# Altium PCB Wakame.PcbDoc
Units mm, origin at the board's own origin, x right, y up, seen from the top; angles counter-clockwise.
Board outline 150 x 150 mm, 2 copper layers (Top Layer, Bottom Layer); 74 components, 89 nets, 674 pads, 0 vias.
Unrouted connection lines stored in the file: 39.
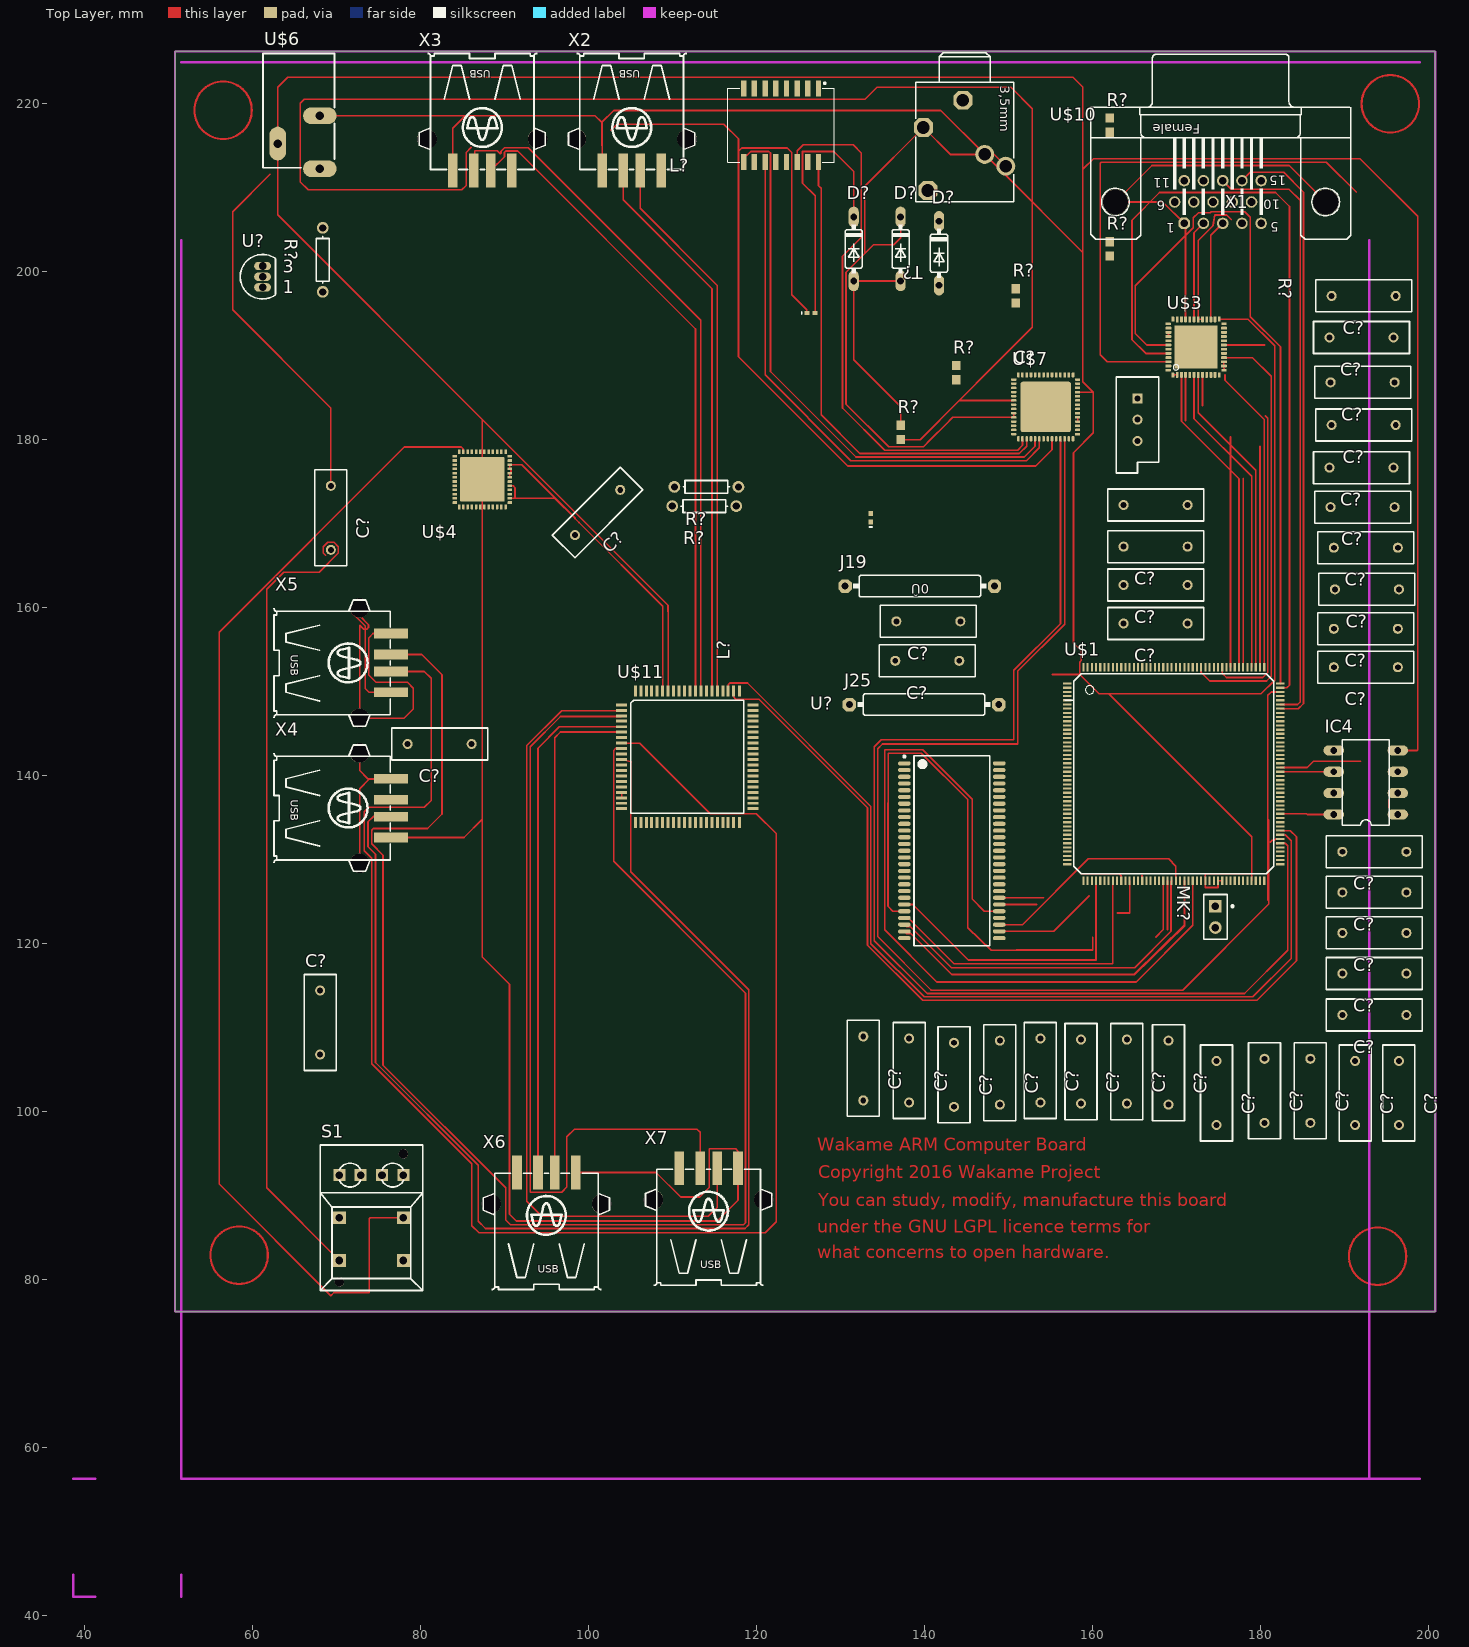
[diagram p0: Top Layer view]
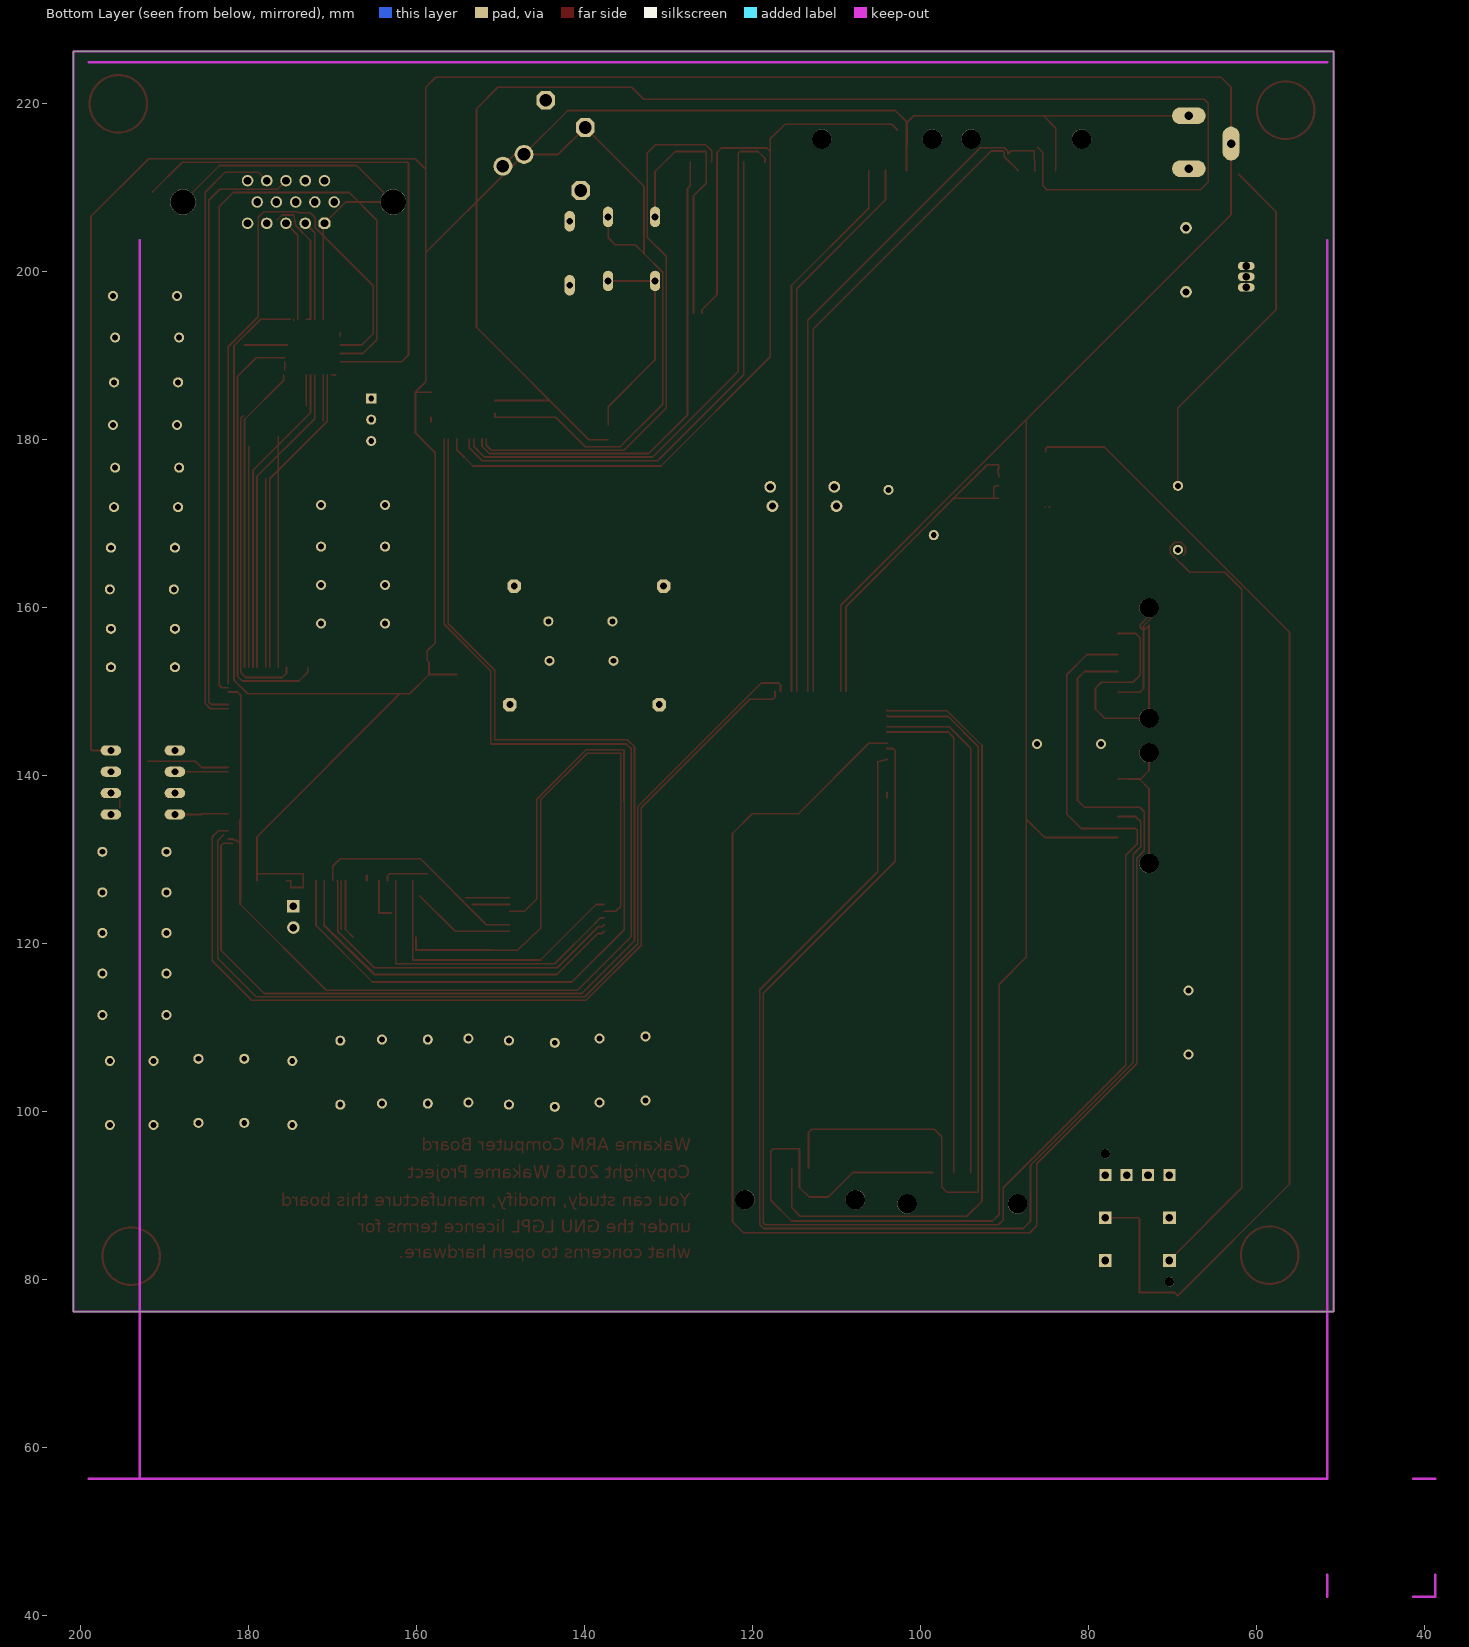
[diagram p1: Bottom Layer view, seen from below]

## Layer stack, top to bottom
Top Layer: signal copper 0.0356
Dielectric: core 0.32, FR-4, Dk 4.8
Bottom Layer: signal copper 0.0356

## Board outline
50.8,76.2 200.8,76.2 200.8,226.2 50.8,226.2

## Design rules (kind name [scope] priority, off if disabled: settings)
Clearance [All] p1: gap=0.2
PolygonConnect [All] p1: connectstyle=Relief reliefconductorwidth=0.254 reliefentries=4 polygonreliefangle="90 Angle"
RoutingLayers [All] p1: top layer_v5=TRUE bottom layer_v5=FALSE
RoutingVias [All] p1: holewidth=0.6 width=1 viastyle="Through Hole" minholewidth=0.711 minwidth=1.27 maxholewidth=0.711 maxwidth=1.27
SilkscreenOverComponentPads [IsPad] p1: minsilkscreentomaskgap=0.254
SolderMaskExpansion [All] p1: expansion=0.102
TestPointUsage [All] p1: valid=0 allowmultiple=FALSE
Testpoint [All] p1: side=3 testpointundercomponent=TRUE minsize=1.016 maxsize=2.54 preferedsize=1.524 minholesize=0 maxholesize=1.016 preferedholesize=0.813 testpointgrid=0.025 style=297 order=0123456789
Width [All] p1: maxlimit=0.2 minlimit=0.2 preferedwidth=0.2
22 further rules are at their usual default settings.

## Components (designator, comment, footprint, x,y, rotation, side; value= is the part's Value field where it differs from the comment)
C? "Cap" RAD-0.3 101.092,171.323 r45 top
C? "Cap" RAD-0.3 153.797,104.902 r90 top
C? "Cap" RAD-0.3 174.752,102.235 r90 top
C? "Cap" RAD-0.3 143.51,104.394 r90 top
C? "Cap" RAD-0.3 138.176,104.902 r90 top
C? "Cap" RAD-0.3 132.715,105.156 r90 top
C? "Cap" RAD-0.3 158.623,104.775 r90 top
C? "Cap" RAD-0.3 192.024,176.657 r0 top
C? "Cap" RAD-0.3 192.278,181.737 r0 top
C? "Cap" RAD-0.3 164.084,104.775 r90 top
C? "Cap" RAD-0.3 192.151,171.958 r0 top
C? "Cap" RAD-0.3 192.659,162.179 r0 top
C? "Cap" RAD-0.3 140.335,153.67 r0 top
C? "Cap" RAD-0.3 193.548,126.111 r0 top
C? "Cap" RAD-0.3 192.532,167.132 r0 top
C? "Cap" RAD-0.3 193.548,116.459 r0 top
C? "Cap" RAD-0.3 193.548,121.285 r0 top
C? "Cap" RAD-0.3 140.462,158.369 r0 top
C? "Cap" RAD-0.3 192.278,197.104 r0 top
C? "Cap" RAD-0.3 69.342,170.688 r90 top
C? "Cap" RAD-0.3 82.296,143.764 r0 top
C? "Cap" RAD-0.3 191.262,102.235 r90 top
C? "Cap" RAD-0.3 192.151,186.817 r0 top
C? "Cap" RAD-0.3 196.469,102.235 r90 top
C? "Cap" RAD-0.3 167.513,167.259 r0 top
C? "Cap" RAD-0.3 192.024,192.151 r0 top
C? "." RAD-0.3 167.513,158.115 r0 top
C? "." RAD-0.3 192.532,152.908 r0 top
C? "." RAD-0.3 167.513,162.687 r0 top
C? "Cap" RAD-0.3 192.532,157.48 r0 top
C? "Cap" RAD-0.3 148.971,104.648 r90 top
C? "Cap" RAD-0.3 193.548,111.506 r0 top
C? "Cap" RAD-0.3 185.928,102.489 r90 top
C? "Cap" RAD-0.3 193.548,130.937 r0 top
C? "Cap" RAD-0.3 180.467,102.489 r90 top
C? "Cap" RAD-0.3 169.037,104.648 r90 top
C? "Cap" RAD-0.3 68.072,110.617 r90 top
C? "Cap" RAD-0.3 167.513,172.212 r0 top
D? "." DIODE_DO35-7 131.572,202.692 r270 top
D? "." DIODE_DO35-7 141.732,202.184 r270 top
D? "." DIODE_DO35-7 137.16,202.692 r270 top
IC4 "AT25*P" DIL08 192.532,139.192 r90 top
J19 "0R" 0R/10 140.716,162.56 r180 top
J25 "0R" 0R/10 141.224,148.463 r180 top
L? "Inductor" 0402-A 126.492,195.072 r0 top
L? "Inductor" 0402-A 133.604,170.688 r90 top
MK? "Mic2" PIN2 174.625,124.46 r270 top
R? "Res1" AXIAL-0.3 68.377,201.396 r270 top
R? "Res1" AXIAL-0.3 113.792,172.085 r0 top
R? "Res1" AXIAL-0.3 114.046,174.371 r0 top
R? "RPot" VR5 165.354,182.372 r270 top
R? "Res3" J1-0603 137.16,180.848 r90 top
R? "Res3" J1-0603 162.052,202.692 r90 top
R? "Res3" J1-0603 143.764,187.96 r90 top
R? "Res3" J1-0603 162.052,217.424 r90 top
R? "Res3" J1-0603 150.876,197.104 r90 top
S1 "55?-2LED01" 5501-2LED 74.168,87.376 r270 top
T? "749010012A" 749010012A 122.936,217.424 r180 top
U$1 "ALLWINNER-A13" PG-LQFP-176-2 169.672,140.208 r0 top
U$3 "ADV7125" LFCSP48 172.339,191.008 r90 top
U$4 "AXP202" QFN48 89.916,177.8 r0 top
U$6 "PWR" SCD-014-A 65.532,226.06 r180 top
U$7 "LAN9500" QFN56 154.432,183.896 r90 top
U$10 "35MMSTEREOJACK" PG203J 154.94,217.932 r0 top
U$11 "USB2507" TQFP80 111.76,142.24 r0 top
U? "L78L05ABZ" TO92 61.214,199.39 r0 top
U? "K4S510432B-TC75" 54_TSOP2_400AF_N 143.256,131.064 r0 top
X1 "HF15H" HDF15H 175.26,208.28 r180 top
X2 "USB-A003" USB-A003 105.156,226.06 r180 top
X3 "USB-A003" USB-A003 87.376,226.06 r180 top
X4 "USB-A003" USB-A003 62.484,136.144 r270 top
X5 "USB-A003" USB-A003 62.484,153.416 r270 top
X6 "USB-A003" USB-A003 94.996,78.74 r0 top
X7 "USB-A003" USB-A003 114.3,79.248 r0 top

## Footprints (in the part's own frame and the unit in brackets; to place one, negate y for a bottom-side part, rotate by r counter-clockwise, add the part's x,y. Pads: shape width x height; smd on the part's side, far side on the other; paste and mask are expansions set on the pad)
0R/10 [mil]
  oct 63x63 hole 32: 1(-300,0) 2(400,0)
  silkscreen extent -262,-50 362,50
54_TSOP2_400AF_N [mm] "SOP, 54-Leads, Body 22.5x10.16mm, Pitch 0.8mm, IPC Medium Density"
  oval 1.5x0.5 smd: 1(-5.65,10.4) 2(-5.65,9.6) 3(-5.65,8.8) 4(-5.65,8) 5(-5.65,7.2) 6(-5.65,6.4) 7(-5.65,5.6) 8(-5.65,4.8) 9(-5.65,4) 10(-5.65,3.2) 11(-5.65,2.4) 12(-5.65,1.6) 13(-5.65,0.8) 14(-5.65,0) 15(-5.65,-0.8) 16(-5.65,-1.6) 17(-5.65,-2.4) 18(-5.65,-3.2) 19(-5.65,-4) 20(-5.65,-4.8) 21(-5.65,-5.6) 22(-5.65,-6.4) 23(-5.65,-7.2) 24(-5.65,-8) 25(-5.65,-8.8) 26(-5.65,-9.6) 27(-5.65,-10.4) 28(5.65,-10.4) 29(5.65,-9.6) 30(5.65,-8.8) 31(5.65,-8) 32(5.65,-7.2) 33(5.65,-6.4) 34(5.65,-5.6) 35(5.65,-4.8) 36(5.65,-4) 37(5.65,-3.2) 38(5.65,-2.4) 39(5.65,-1.6) 40(5.65,-0.8) 41(5.65,0) 42(5.65,0.8) 43(5.65,1.6) 44(5.65,2.4) 45(5.65,3.2) 46(5.65,4) 47(5.65,4.8) 48(5.65,5.6) 49(5.65,6.4) 50(5.65,7.2) 51(5.65,8) 52(5.65,8.8) 53(5.65,9.6) 54(5.65,10.4)
  silkscreen extent -5.77,-11.3 4.5,11.32, body extent -5.08,-11.23 5.08,11.23, height 1.2
0402-A [mm] "Chip Inductor; Body 1 x 0.5 mm (LxW typ)"
  rect 0.6x0.5 smd: 1(-0.5,0) 2(0.5,0)
  silkscreen extent -1.1,-0.15 -1.1,0.15
5501-2LED [mil]
  round 44 hole 44: 1(-300,150) 1(300,-150)
  rect 60x60 hole 36: 1A(0,150) 1B(0,-150) NC(200,-150) NO(200,150)
  rect 56x56 hole 36: +G(-200,150) +R(-200,-150) -G(-200,50) -R(-200,-50)
  silkscreen extent -341,-240 341,241
749010012A [mm] "10/100 Base-T SMD Transformer 1 Port"
  rect 0.64x1.91 smd: 1(-4.445,-4.385) 2(-3.175,-4.385) 3(-1.905,-4.385) 4(-0.635,-4.385) 5(0.635,-4.385) 6(1.905,-4.385) 7(3.175,-4.385) 8(4.445,-4.385) 9(4.445,4.385) 10(3.175,4.385) 11(1.905,4.385) 12(0.635,4.385) 13(-0.635,4.385) 14(-1.905,4.385) 15(-3.175,4.385) 16(-4.445,4.385)
  silkscreen extent -6.35,-5.1 6.35,4.4, body extent -6.35,-4.7 6.35,4.7, height 6.35
AXIAL-0.3 [mm] "Resistor; 2 Leads"
  round 1.4 hole 0.85: 1(-3.81,0) 2(3.81,0)
  silkscreen extent -2.77,-0.76 2.77,0.76
DIL08 [mil]
  oval 48x96 hole 32: 1(-150,-150) 2(-50,-150) 3(50,-150) 4(150,-150) 5(150,150) 6(50,150) 7(-50,150) 8(-150,150)
  silkscreen extent -200,-110 200,110
DIODE_DO35-7 [mil]
  oval 96x48 hole 32: A(150,0) C(-150,0)
  silkscreen extent -115,-40 115,40
HDF15H [mil]
  round 119 hole 119: 1(-492.13,0) 1(493,0)
  oct 54x54 hole 36: 1(171,100)
  round 54 hole 36: 2(81,100) 3(-9.57,100) 4(-99.57,100) 5(-189.57,100) 6(216,0) 7(126,0) 8(36,0) 9(-54.57,0) 10(-144.57,0) 11(171,-100) 12(81,-100) 13(-9.57,-100) 14(-99.57,-100) 15(-189.57,-100)
  silkscreen extent -610,-693 610,175
J1-0603 [mm] "Chip Resistor; Body 1.6 x 0.8 mm (LxW typ)"
  rect 1.1x1 smd: 1(-0.85,0) 2(0.85,0)
LFCSP48 [mil]
  rrect50% 24x13 smd: 1(-130.91,109) 12(-130.91,-108.27) 25(131,-108.27) 36(131,109)
  rrect50% 28x13 smd: 2(-129.92,89) 3(-129.92,69) 4(-129.92,50) 5(-129.92,30) 6(-129.92,10) 7(-129.92,-9.84) 8(-129.92,-29.53) 9(-129.92,-49.21) 10(-129.92,-68.9) 11(-129.92,-88.58) 26(130,-88.58) 27(130,-68.9) 28(130,-49.21) 29(130,-29.53) 30(130,-9.84) 31(130,10) 32(130,30) 33(130,50) 34(130,69) 35(130,89)
  rrect50% 13x24 smd: 13(-108.27,-130.91) 24(109,-130.91) 37(109,131) 48(-108.27,131)
  rrect50% 13x28 smd: 14(-88.58,-129.92) 15(-68.9,-129.92) 16(-49.21,-129.92) 17(-29.53,-129.92) 18(-9.84,-129.92) 19(10,-129.92) 20(30,-129.92) 21(50,-129.92) 22(69,-129.92) 23(89,-129.92) 38(89,130) 39(69,130) 40(50,130) 41(30,130) 42(10,130) 43(-9.84,130) 44(-29.53,130) 45(-49.21,130) 46(-68.9,130) 47(-88.58,130)
  rect 201x201 smd: EXP(0,0)
  silkscreen extent -107,82 -81,108
PG203J [mil]
  oct 88.5x88.5 hole 59: GND(-408,97) LEFT1(-572,-326) LEFT2(-593,-31)
  round 88.5 hole 59: RIGHT1(-207,-212) RIGHT2(-306,-157)
  silkscreen extent -630,-380 -170,320
PG-LQFP-176-2 [mil]
  rect 10x40 smd: AGND(247,-500) AVCC(286,-500) DDR3_A0(-49.21,-500) DDR3_A1(-285.43,-500) DDR3_A2(-9.84,-500) DDR3_A3(-29.53,-500) DDR3_A4(-305.12,-500) DDR3_A5(10,-500) DDR3_A6(-246.06,-500) DDR3_A7(89,-500) DDR3_A8(-226.38,-500) DDR3_A9(50,-500) DDR3_A10(-364.17,-500) DDR3_A11(-206.69,-500) DDR3_A12(-324.8,-500) DDR3_A13(30,-500) DDR3_A14(-187.01,-500) DDR3_BA0(-68.9,-500) DDR3_BA1(-344.49,-500) DDR3_BA2(-108.27,-500) DDR3_CAS(-147.64,-500) DDR3_CK(-423.23,-500) DDR3_CK_N(-403.54,-500) DDR3_CKE(-383.86,-500) DDR3_ODT(109,-500) DDR3_RAS(-167.32,-500) DDR3_RST(69,-500) DDR3_WE(-127.95,-500) HPBP(168,-500) HPCOM(207,-500) HPOUTL(148,-500) HPOUTR(227,-500) LCD_D2/PD2(128,500) LCD_D3/PD3(148,500) LCD_D4/PD4(168,500) LCD_D5/PD5(188,500) LCD_D6/PD6(207,500) LCD_D7/PD7(227,500) LCD_D10/PD10(266,500) LCD_D11/PD11(286,500) LCD_D12/PD12(306,500) LCD_D13/PD13(325,500) LCD_D14/PD14(345,500) LCD_D15/PD15(365,500) LCD_D18/PD18(384,500) LCD_D19/PD19(404,500) LCD_D20/PD20(424,500) LRADC(384,-500) MICIN1(345,-500) NDQ0/SDC2_D0/PC8(-383.86,500) NDQ1/SDC2_D1/PC9(-344.49,500) NDQ2/SDC2_D2/PC10(-324.8,500) NDQ3/SDC2_D3/PC11(-305.12,500) NDQ4/SDC2_D4/PC12(-265.75,500) NDQ5/SDC2_D5/PC13(-246.06,500) NDQ6/SDC2_D6/PC14(-226.38,500) NDQ7/SDC2_D7/PC15(-206.69,500) NDQS/PC19(-147.64,500) NMI_N(-68.9,500) NRB0/SDC2_CMD/PC6(-423.23,500) NRB1/SDC2_CLK/PC7(-403.54,500) PB3/EINT17(89,500) PB17(-127.95,500) PB18(-108.27,500) PG0/EINT0(-9.84,500) PG1/EINT1(10,500) PG2/EINT2(30,500) PG3/UART1_TX/EINT3(50,500) PG4/UART1_RX/EINT14(69,500) RESET_N(-88.58,500) TPX2(404,-500) TPY2(424,-500) UBOOT(-49.21,500) V33_HP(188,-500) VCC3(247,500) VCC4(-167.32,500) VCC4_DRAM(-265.75,-500) VCC5_DRAM(-88.58,-500) VDD2_INT(128,-500) VDD5_CPU(-29.53,500) VDD5_INT(109,500) VDD6_CPU(-187.01,500) VDD7_CPU(-285.43,500) VDD8_CPU(-364.17,500) VMIC(365,-500) VRA1(325,-500) VRA2(306,-500) VRP(266,-500)
  rect 40x10 smd: CSI_D0/SDC_D0/PE4(500,148) CSI_D2/SDC2_D2/PE6(500,188) CSI_D3/SDC2_D3/PE7(500,207) CSI_D4/SDC2_CMD/PE8(500,227) CSI_D5/SDC2_CLK/PE9(500,247) CSI_D6/UART1_TX/PE10(500,266) CSI_D7/UART1_RX/PE11(500,286) CSI_DI/SDC2_DI/PE5(500,168) CSI_HSYNC/SP2_MOSI/P(500,109) CSI_MCLK/SPI2_CLK/EI(500,89) CSI_PCLK/SPI2_CS0/EI(500,69) CSI_VSYNC/SPI2_MISO/(500,128) DDR3_D0(-500,10) DDR3_D1(-500,-344.49) DDR3_D2(-500,30) DDR3_D3(-500,-364.17) DDR3_D4(-500,69) DDR3_D5(-500,-423.23) DDR3_D6(-500,50) DDR3_D7(-500,-383.86) DDR3_D9(-500,-49.21) DDR3_D10(-500,-324.8) DDR3_D11(-500,-29.53) DDR3_D12(-500,-265.75) DDR3_D13(-500,-68.9) DDR3_D14(-500,-305.12) DDR3_D15(-500,-88.58) DDR3_DM0(-500,-127.95) DDR3_DM1(-500,-108.27) DDR3_DQS0(-500,-167.32) DDR3_DQS0_N(-500,-187.01) DDR3_DQS1(-500,-206.69) DDR3_DQS1_N(-500,-226.38) DDR3_R8(-500,-285.43) DZQ(-500,109) LCD_CLK/PD24(500,365) LCD_D21/PD21(500,424) LCD_D22/PD22(500,404) LCD_D23/PD23(500,384) LCD_DE/PD25(500,345) LCD_HSYNC/PD26(500,325) LCD_VSYNC/PD27(500,306) NALE/SPIO_MISO/PCI(-500,306) NC(500,-226.38) NCE0(-500,404) NCE1/SPIO0/PC3(-500,384) NCLE/SPIO_CLK/PC2(-500,325) NRE(-500,424) NWE/SPIO_MOSI/PC0(-500,286) PB2/EINT16(500,-147.64) PB4_EINT18(500,-127.95) PB10/EINT24(-500,247) PB15(500,-108.27) PB16(500,-88.58) PG9/SPI1_CS0/UART3_T(-500,207) PG10/SPI1_CLK/UART3_(-500,188) PG11/SPI1_MOSI/EINT1(-500,168) PG12/SPI1_MISO/UART3(-500,148) SDC0/PF1(500,-49.21) SDC0_CLK/PF2(500,-9.84) SDC0_CMD/PF3(500,10) SDC0_D3/PF4(500,30) SDC0_DI/PF0(500,-68.9) SDCO_D2/PF5(500,50) SVREF(-500,89) TPX1(500,-423.23) TPY1(500,-403.54) TWI0-SCK/PB0(500,-187.01) TWIO-SDA/PB1(500,-167.32) UDM0(500,-344.49) UDM1(500,-305.12) UDP0(500,-324.8) UDP1(500,-285.43) V33_USB(500,-265.75) VCC1(-500,345) VCC1_DRAM(-500,-9.84) VCC2(500,-206.69) VCC2_DRAM(-500,-147.64) VCC3_DRAM(-500,-403.54) VDD1_CPU(-500,365) VDD1_INT(-500,-246.06) VDD2_CPU/PB10/EINT24(-500,266) VDD3-INT(500,-246.06) VDD3_CPU(-500,227) VDD4_CPU(-500,128) VDD4_INT(500,-29.53) X24MIN(500,-364.17) X24OUT(500,-383.86)
  silkscreen extent -512,-468 469,469
PIN2 [mm] "Photosensitive Diode; 2 Leads"
  rect 1.5x1.5 hole 0.9: 1(0,0)
  round 1.5 hole 0.9: 2(2.54,0)
  silkscreen extent -1.4,-1.4 3.94,2.18
QFN48 [mil]
  rrect30% 22x12 smd: ACIN(29,-50.79) ACIN1(29,-70.47) BACKUP(29,-109.84) CHGLED(29,9) DC3SET(29,-129.53) DCDC2(-228.94,-168.9) GPIO2(-228.94,-70.47) GPIO3(-228.94,-31.1) IPSOUT(29,-11.42) IPSOUT1(29,-31.1) LDO1(29,-149.21) LDO2(-228.94,-208.27) LDO4(-228.94,-188.58) LX2(-228.94,-129.53) N_OE(-228.94,-50.79) N_VBUSEN(-228.94,-90.16) PGND2(-228.94,-149.21) PWREN(29,-168.9) PWROK(29,-208.27) SCK(-228.94,-11.42) SDA(-228.94,9) VBUS(29,-90.16) VIN2(-228.94,-109.84) VINT(29,-188.58)
  rrect30% 12x22 smd: AGND(-31.1,-228.94) APS(-50.79,-228.94) BAT(-11.42,29) BAT1(-31.1,29) BATSENSE(-90.16,29) BIAS(-11.42,-228.94) CHSENSE(-109.84,29) DCDC3(-129.53,-228.94) EXTEN(-70.47,-228.94) GPIO0(-90.16,-228.94) GPIO1(-109.84,-228.94) IRQ(-208.27,29) LDO3(-70.47,29) LDO3IN(-50.79,29) LDO24IN(-208.27,-228.94) LX(-168.9,-228.94) LX1(-149.21,29) PGND1(-168.9,29) PGND3(-149.21,-228.94) PWRON(-188.58,29) TS(9,29) VIN1(-129.53,29) VIN3(-188.58,-228.94) VREF(9,-228.94)
  rrect5% 209x209 smd: EXP(-100,-100)
QFN56 [mil]
  rrect50% 24x12 smd: 1(-149.61,128) 2(-149.61,109) 3(-149.61,89) 4(-149.61,69) 5(-149.61,50) 6(-149.61,30) 7(-149.61,10) 8(-149.61,-9.84) 9(-149.61,-29.53) 10(-149.61,-49.21) 11(-149.61,-68.9) 12(-149.61,-88.58) 13(-149.61,-108.27) 14(-149.61,-127.95) 29(150,-127.95) 30(150,-108.27) 31(150,-88.58) 32(150,-68.9) 33(150,-49.21) 34(150,-29.53) 35(150,-9.84) 36(150,10) 37(150,30) 38(150,50) 39(150,69) 40(150,89) 41(150,109) 42(150,128)
  rrect50% 12x24 smd: 15(-127.95,-149.61) 16(-108.27,-149.61) 17(-88.58,-149.61) 18(-68.9,-149.61) 19(-49.21,-149.61) 20(-29.53,-149.61) 21(-9.84,-149.61) 22(10,-149.61) 23(30,-149.61) 24(50,-149.61) 25(69,-149.61) 26(89,-149.61) 27(109,-149.61) 28(128,-149.61) 43(128,150) 44(109,150) 45(89,150) 46(69,150) 47(50,150) 48(30,150) 49(10,150) 50(-9.84,150) 51(-29.53,150) 52(-49.21,150) 53(-68.9,150) 54(-88.58,150) 55(-108.27,150) 56(-127.95,150)
  rrect10% 237x237 smd: EPAD(0,0)
RAD-0.3 [mm] "Capacitor; 2 Leads"
  round 1.2 hole 0.7: 1(-3.81,0) 2(3.81,0)
  silkscreen extent -5.71,-1.9 5.71,1.9
SCD-014-A [mil]
  oval 158x79 hole 40: +(-98.43,544) GND1(-98.43,296)
  oval 79x158 hole 40: GND(99,426)
  silkscreen extent -167,4 168,540
TO92 [mm] "TO, Flat Index; 3 In-Line, Axial Leads; Body Dia. 4.8mm; Leads 0.51 x 0.51 mm (max)"
  oval 2x1 hole 0.9: 1(0,-1.27) 2(0,0) 3(0,1.27)
  silkscreen extent -2.65,-2.65 1.55,2.65
TQFP80 [mil]
  rect 14x52 smd: AM1/GANG_EN(-191.93,-307.09) AM2/MTT_EN(-140.75,-307.09) AM3(-89.57,-307.09) AM4/LED_EN(-38.39,-307.09) AM5(90,-307.09) AM6(141,-307.09) AM7(192,-307.09) ATEST/REG_EN(-191.93,308) GR1/NON_REM0(-166.34,-307.09) GR2_NON_REM1(-115.16,-307.09) GR3/PRT_DIS0(-63.98,-307.09) GR4/PRT_DIS1(-12.8,-307.09) GR5(116,-307.09) GR6(167,-307.09) GR7(218,-307.09) PRTPWR1(244,-307.09) RBIAS(-217.52,308) SCL/SMBCLK/CFG_SEL0(-243.11,-307.09) SDA/SMBDATA(-217.52,-307.09) USBDN0(192,308) USBDN1(141,308) USBDN2(39,308) USBDP0(218,308) USBDP1(116,308) USBDP2(64,308) VDD18(64,-307.09) VDD18.2(-38.39,308) VDD33(13,-307.09) VDD33.3(244,308) VDDA18/PLL(-140.75,308) VDDA33.4(90,308) VDDA33/PLL(-166.34,308) VSS0(-243.11,308) VSS4(39,-307.09) VSS6(167,308) VSS7(13,308) VSS8(-12.8,308) VSS9(-63.98,308) XTAL1/CLKIN(-115.16,308) XTAL2(-89.57,308)
  rect 52x14 smd: CFG_SEL1(-307.09,-243.11) CLKIN_EN(308,167) OCS1_N(308,-243.11) OCS2_N(308,-191.93) OCS3_N(308,-140.75) OCS4_N(308,-89.57) OCS5_N(308,39) OCS6_N(308,90) OCS7_N(308,141) PRTPWR2(308,-217.52) PRTPWR3(308,-166.34) PRTPWR4(308,-115.16) PRTPWR5(308,-63.98) PRTPWR6(308,64) PRTPWR7(308,116) PRTPWR_POL(308,192) RESET_N(308,218) SELF_PWR(-307.09,-217.52) TEST0(-307.09,-166.34) TEST1(-307.09,-191.93) USBDN3(-307.09,192) USBDN4(-307.09,141) USBDN5(-307.09,39) USBDN6(-307.09,-12.8) USBDN7(-307.09,-115.16) USBDP3(-307.09,218) USBDP4(-307.09,116) USBDP5(-307.09,64) USBDP6(-307.09,-38.39) USBDP7(-307.09,-89.57) VBUS_DET(308,244) VDD18.3(308,-12.8) VDD33CR(308,13) VDDA3.1(-307.09,90) VDDA33(-307.09,244) VDDA33.2(-307.09,-63.98) VSS(-307.09,167) VSS1(-307.09,13) VSS3(-307.09,-140.75) VSS5(308,-38.39)
  silkscreen extent -264,-264 265,265
USB-A003 [mil]
  round 91 hole 91: 1(-258.66,405) 1(259,405)
  rect 45x158 smd: 1(-137.8,552) 2(-39.37,552) 3(40,552) 4(138,552)
  silkscreen extent -295,0 296,548
VR5 [mm] "Potentiometer; 3 Leads"
  rect 1.2x1.2 hole 0.7: 1(-2.54,0)
  round 1.2 hole 0.7: 2(0,0) 3(2.54,0)
  silkscreen extent -5.08,-2.54 6.35,2.54

## Part data
C? C? C? C? C? C? C? C? C? C? C? C? C? C? C? C? C? C? C? C? C? C? C? C? C? C? C? C? C? C? C? C? C? C? C?: "Capacitor"
C? C? C?: library part Cap, "Capacitor"
D? D? D?: library part SCHOTTKY-DIODEDO35-7
IC4: "SPI bus serial <B>EEPROM</B>"
J19 J25: "Bridge 0R 10mm"
MK?: "Microphone"
R? R? R? R? R? R? R? R?: "Resistor"
R?: "Potentiometer"
S1: "<b>PUSHBUTTON SERIES 5500 SWITCHES</b> 2 LED<p> / Source: www.e-switch.com .. 5500.pdf"
T?: "10/100 Base-T SMD Transformer 1 Port"
U$4: "Allwinner a13 pwr ic"
U$6: "Main Power Jack"
U$11: "usb 2507 hub on chiip"
U?: "Positive Voltage Regulator"
U?: "512Mb Synchronous High Data Rate DRAM, 32Mb x 4Bit x 4 Banks, 54-Pin TSOP"
X1: "<b>SUB-D</b>"
X2 X3 X4 X5 X6 X7: "<b>USB connector</b>"

## Nets (pads, with @x,y where several pads share a name; then routed paths per layer and width w, separated by ;. In a path a pad name is that pad's centre, name@x,y a point inside that pad or via, vN(x,y) a via of type N, cw(c..) or ccw(c..) an arc to the next point about the centre after c; other vN are vias at no path point)
GND: U$11.SELF_PWR
N$232: 
NetC2_1: S1.NC | length 98.5
  Top Layer w0.2: 61.722,106.172 61.722,105.537 ; 68.706,166.242 68.442,166.505 68.442,167.251 68.969,167.778 69.715,167.778 70.242,167.251 70.242,166.505 67.948,164.211 63.754,164.211 61.722,162.179 61.722,105.537 ; S1.NC 61.722,90.932 61.722,105.537
NetC2_2: S1.1A U$4.PWRON | length 140.7
  Top Layer w0.2: S1.1A 74.041,87.376 73.914,87.249 73.914,78.486 69.723,78.486 69.342,78.105 56.053,91.394 56.053,157.076 78.093,179.116 84.876,179.116 85.078,178.913 85.078,178.584 U$4.PWRON
NetC?_1: C?.1@98.398,168.629 U$4.LDO1 U$4.PWROK
NetC?_1: D?.C@137.16,206.502 L?.2@133.604,171.188 U$7.52 U?.2@137.606,140.664 | length 869.5
  Top Layer w0.2: 68.032,218.542 85.344,218.542 ; 71.882,159.36 73.431,157.81 73.431,150.368 73.889,149.911 76.505,149.911 ; 76.505,132.639 85.192,132.639 87.376,134.823 ; 83.871,212.039 83.871,217.068 85.344,218.542 ; 98.501,92.761 108.052,92.761 110.973,89.84 113.233,89.84 114.376,90.983 114.376,95.529 114.427,95.58 117.526,95.58 117.805,95.301 117.805,93.269 117.805,89.459 115.341,86.995 91.415,86.995 90.602,87.808 90.602,115.189 87.376,118.415 87.376,134.823 ; 109.485,150.063 109.485,159.512 ; 109.485,159.893 109.485,159.512 ; D?.C@137.16,206.502 137.16,204.013 136.347,203.2 133.937,203.2 132.893,202.156 ; 149.682,212.547 148.285,213.944 147.168,213.944 ; 150.622,183.146 U$7.52 143.383,182.646 142.508,181.772 140.759,180.022 139.885,179.148 135.738,179.148 130.66,184.226 130.66,199.923 ; 155.194,152.044 158.471,152.044 ; 158.232,185.649 160.096,185.649 ; 175.438,127.508 174.93,127.508 174.93,126.695 173.431,126.695 173.431,127.508 173.431,128.321 178.943,128.321 ; 178.943,127.508 178.943,128.321 ; 195.275,136.211 195.275,137.093 ; 196.342,143.002 198.628,143.002 198.704,143.078 198.704,206.578 191.846,213.436 160.122,213.436 158.852,212.166 ; 85.344,218.542 100.787,218.542 ; 87.376,134.823 87.376,170.891 87.376,178.537 87.376,179.244 87.376,179.299 87.376,182.397 ; 87.376,182.397 63.017,206.756 63.017,215.24 63.017,221.945 64.211,223.139 157.683,223.139 158.852,221.971 158.852,212.166 ; 87.376,182.397 90.475,179.299 109.474,160.299 109.474,159.523 109.485,159.512 ; 100.787,218.542 101.575,217.754 ; 100.787,218.542 101.575,217.754 ; 101.575,217.754 101.651,217.678 101.651,212.039 101.575,217.754 ; 101.575,217.754 102.997,219.177 141.935,219.177 147.168,213.944 ; 130.66,199.923 132.893,202.156 ; 130.66,199.923 132.893,202.156 ; 132.893,202.156 132.893,210.16 139.878,217.145 143.078,213.944 147.168,213.944 ; 147.168,213.944 149.123,211.988 158.852,202.26 ; 158.471,152.044 158.471,153.516 158.671,153.716 158.671,154.857 157.734,155.794 157.734,178.435 160.096,180.797 160.096,185.649 ; 158.471,152.044 160.782,149.733 161.95,149.733 ; 158.852,202.26 158.852,186.893 160.096,185.649 ; 158.852,202.26 158.852,212.166 ; 161.95,149.733 180.061,149.733 181.686,151.359 181.686,191.154 178.504,194.335 175.089,194.335 175.031,194.335 ; 161.95,149.733 178.943,132.74 178.943,128.321 ; 175.031,194.335 175.06,194.364 175.031,194.335
NetC?_2: C?.2@103.786,174.017 R?.1@137.16,179.998 U$4.VINT U$7.9 U$7.48 | length 345.7
  Top Layer w0.2: 86.055,214.782 85.446,214.173 85.446,210.236 84.938,209.728 66.65,209.728 65.71,210.668 65.71,220.015 66.192,220.497 132.918,220.497 134.341,221.92 150.292,221.92 152.832,219.38 152.832,193.358 139.471,179.998 ; U$4.VINT 91.261,173.01 ; 90.653,174.51 91.034,174.51 91.261,174.283 91.261,173.01 ; 90.653,175.51 90.653,176.01 90.78,176.01 90.78,176.51 90.653,176.51 90.653,177.01 92.052,177.01 98.425,170.637 98.4,170.612 ; 102.692,216.84 103.403,217.551 116.103,217.551 117.856,215.798 117.856,214.3 ; 108.835,150.063 108.835,160.176 98.882,170.129 ; 125.992,195.072 125.992,195.47 124.206,197.256 124.206,214.173 123.673,214.706 118.262,214.706 117.856,214.3 ; R?.1@137.16,179.998 139.471,179.998 ; U$7.48 144.143,184.658 139.483,179.998 139.471,179.998 ; U$7.9 155.182,178.804 153.238,176.86 130.861,176.86 117.856,189.865 117.856,214.3 ; 91.261,173.01 91.262,173.01 91.277,173.025 95.987,173.025 98.4,170.612 ; 98.4,170.612 98.882,170.129 ; 98.4,170.612 98.882,170.129
NetC?_2: L?.1@133.604,170.188
NetD?_A: D?.A@131.572,198.882 D?.A@137.16,198.882 R?.2@137.16,181.698 | length 25.1
  Top Layer w0.2: R?.2@137.16,181.698 137.16,183.896 131.572,189.484 131.572,198.882 D?.A@137.16,198.882
NetIC4_1: IC4.1 U$1.SDC0_D3/PF4 | length 11
  Top Layer w0.2: U$1.SDC0_D3/PF4 185.547,140.97 186.309,141.732 191.922,141.732 ; IC4.1 IC4.1@197.485,135.382
NetIC4_2: IC4.2 U$1.SDCO_D2/PF5
NetIC4_5: IC4.5
NetIC4_6: IC4.6 U$1.SDC0_CMD/PF3 | length 6.3
  Top Layer w0.2: U$1.SDC0_CMD/PF3 IC4.6
NetIC4_8: IC4.8 U$1.TWI0-SCK/PB0 | length 6.4
  Top Layer w0.2: U$1.TWI0-SCK/PB0 185.471,135.458 185.547,135.382 IC4.8
NetIC*_1: U$11.PRTPWR7
NetIC*_1: U$11.PRTPWR4
NetIC*_2: U$11.OCS2_N
NetIC*_3: U$11.VSS5
NetIC*_3: U$11.OCS3_N
NetIC*_4: U$11.PRTPWR5
NetIC*_4: U$11.PRTPWR3
NetIC*_5: X3.1 X4.1 | length 20.8
  Top Layer w0.2: X4.1@72.771,129.565 72.771,138.45 73.853,139.532 ; X4.1@72.771,142.714 72.771,140.614 ; 72.771,140.614 73.741,139.644 ; 72.771,140.614 73.741,139.644 ; 73.741,139.644 73.853,139.532 ; 73.741,139.644 76.505,139.644 73.853,139.532
NetIC*_5: 
NetIC*_7: U?.1@61.214,198.12
NetIC*_8: X5.1 | length 37.8
  Top Layer w0.2: X5.1@72.771,159.986 72.771,159.036 73.831,157.976 73.831,157.645 73.597,157.41 73.266,157.41 72.771,157.905 72.771,146.837 78.054,146.837 79.146,147.93 79.146,150.417 78.459,151.105 74.711,151.105 73.838,151.978 73.838,156.385 74.368,156.916 X5.1@76.505,156.916
NetIC*_8: X2.1
NetL9_1: U$4.LX2
NetL12_2: U$4.LX1
NetL13_1: U$4.LX
NetMK?_1: MK?.1 U$1.MICIN1
NetR?_1: R?.1@68.377,205.206 U$6.+ U?.3@137.606,139.864
NetR?_1: R?.1@165.354,184.912 U$3.37
NetR?_2: R?.2@68.377,197.586 U$4.TS
NetT?_9: T?.9 U$7.5 | length 67.2
  Top Layer w0.2: T?.9 118.491,213.468 119.323,214.3 121.469,214.3 121.666,214.103 121.666,188.112 131.851,177.927 151.892,177.927 153.162,179.197 U$7.5
NetT?_11: T?.11 U$7.6 | length 63.9
  Top Layer w0.2: T?.11 121.031,187.706 131.242,177.495 152.14,177.495 153.67,179.026 U$7.6
NetT?_14: T?.14 U$7.2 | length 65.5
  Top Layer w0.2: T?.14 124.841,214.376 125.559,215.094 131.514,215.094 132.486,214.122 132.486,204.064 130.251,201.828 130.251,183.769 135.272,178.748 151.087,178.748 151.663,179.324 U$7.2
NetT?_16: T?.16 U$7.3 | length 57.8
  Top Layer w0.2: T?.16 127.381,210.231 127.701,209.911 127.701,182.956 132.309,178.348 151.297,178.348 152.171,179.222 U$7.3
NetU$1_DDR3_A0: U$1.DDR3_A0 U?.23 | length 72
  Top Layer w0.2: U?.23 136.232,123.864 135.655,124.441 135.655,136.767 135.674,136.786 135.674,142.678 139.636,142.678 145.161,137.153 145.161,121.92 145.145,121.903 147.955,119.234 150.915,119.234 150.934,119.253 160.02,119.253 160.02,120.775 160.022,120.777 ; 167.513,120.777 168.422,121.686 U$1.DDR3_A0
NetU$1_DDR3_A1: U$1.DDR3_A1 U?.24 | length 37
  Top Layer w0.2: U?.24 138.084,123.064 138.656,122.492 138.656,122.456 143.51,117.602 162.422,117.602 U$1.DDR3_A1
NetU$1_DDR3_A2: U$1.DDR3_A2 U?.25 | length 41.7
  Top Layer w0.2: U?.25 137.856,122.014 138.334,122.014 143.216,117.132 165.011,117.132 169.349,121.47 169.349,127.435 U$1.DDR3_A2
NetU$1_DDR3_A3: U$1.DDR3_A3 U?.26 | length 13.6
  Top Layer w0.2: U?.26 137.856,121.214 138.374,121.214 143.256,116.332 ; 168.922,121.666 U$1.DDR3_A3
NetU$1_DDR3_A4: U$1.DDR3_A4 U?.29 | length 12.5
  Top Layer w0.2: U?.29 155.373,121.464 159.61,125.701
NetU$1_DDR3_A5: U$1.DDR3_A5 U?.30 | length 26.4
  Top Layer w0.2: U?.30 151.66,122.264 159.495,130.099 169.062,130.099 169.926,129.235 U$1.DDR3_A5
NetU$1_DDR3_A6: U$1.DDR3_A6 U?.31 | length 5.4
  Top Layer w0.2: 158.676,128.321 163.17,128.321 163.422,128.068 U$1.DDR3_A6
NetU$1_DDR3_A7: U$1.DDR3_A7 U?.32 | length 97.4
  Top Layer w0.2: 141.478,115.443 135.255,121.666 135.255,136.933 135.274,136.952 135.274,143.078 139.802,143.078 145.669,137.211 145.669,125.312 147.117,123.864 U?.32 ; 164.973,115.443 165.202,115.443 171.933,122.174 U$1.DDR3_A7
  Top Layer w0.254: 141.478,115.443 164.973,115.443
NetU$1_DDR3_A8: U$1.DDR3_A8 U?.33 | length 4.4
  Top Layer w0.2: U?.33 153.339,124.664
NetU$1_DDR3_A9: U$1.DDR3_A9 U?.34 | length 18.9
  Top Layer w0.2: U?.34 154.166,125.464 ; 170.942,122.174 U$1.DDR3_A9
  Top Layer w0.254: 164.973,116.332 170.942,122.174
NetU$1_DDR3_A10: U$1.DDR3_A10 U?.22 | length 35
  Top Layer w0.2: U?.22 138.607,124.664 145.212,118.059 160.422,118.059 U$1.DDR3_A10
NetU$1_DDR3_A11: U$1.DDR3_A11 U?.35 | length 5.3
  Top Layer w0.2: 162.984,123.655 164.422,123.655 U$1.DDR3_A11
NetU$1_DDR3_A12: U$1.DDR3_A12 U?.36
NetU$1_DDR3_BA0: U$1.DDR3_BA0
NetU$1_DDR3_CAS: U$1.DDR3_CAS U?.17 | length 1.3
  Top Layer w0.2: U$1.DDR3_CAS@165.849,127.508 165.849,128.14 165.922,128.067 U$1.DDR3_CAS
NetU$1_DDR3_DQS0: U$1.DDR3_DQS0 U?.5
NetU$1_DDR3_DQS1: U$1.DDR3_DQS1
NetU$1_DDR3_WE: U$1.DDR3_WE U?.16
NetU$1_LCD_D2/PD2: U$1.LCD_D2/PD2 U$3.16 | length 51.9
  Top Layer w0.2: U$1.LCD_D2/PD2 172.923,152.298 173.958,151.263 180.715,151.263 181.269,151.817 181.269,187.539 179.05,189.758 U$3.16
NetU$1_LCD_D7/PD7: U$1.LCD_D7/PD7 U$3.19 | length 42.4
  Top Layer w0.2: U$3.19@175.385,191.262 180.467,191.262 ; U$1.LCD_D7/PD7 175.438,152.197 175.952,151.682 180.275,151.682 180.869,152.276 180.869,182.536 180.55,182.855
NetU$1_LCD_D10/PD10: U$1.LCD_D10/PD10 U$3.8 | length 31.1
  Top Layer w0.2: 173.089,184.023 U$3.8 ; U$1.LCD_D10/PD10 176.428,180.34
NetU$1_LCD_D12/PD12: U$1.LCD_D12/PD12 U$3.3 | length 37.6
  Top Layer w0.2: U$3.3 170.586,182.18 177.444,175.322 U$1.LCD_D12/PD12
NetU$1_LCD_D13/PD13: U$1.LCD_D13/PD13 U$3.4 | length 27.9
  Top Layer w0.2: 171.069,182.263 U$3.4 ; U$1.LCD_D13/PD13 177.927,175.405
NetU$1_LCD_D15/PD15: U$1.LCD_D15/PD15 U$3.6 | length 37.6
  Top Layer w0.2: U$3.6 172.085,182.499 178.943,175.641 U$1.LCD_D15/PD15
NetU$1_LCD_D18/PD18: U$1.LCD_D18/PD18 U$3.7 | length 37.6
  Top Layer w0.2: U$3.7 172.589,183.185 179.426,176.348 U$1.LCD_D18/PD18
NetU$1_LCD_D19/PD19: U$1.LCD_D19/PD19 U$3.45 | length 26.3
  Top Layer w0.2: U$1.LCD_D19/PD19 179.934,179.197
NetU$1_LCD_D20/PD20: U$1.LCD_D20/PD20 U$3.41 | length 36.7
  Top Layer w0.2: 175.768,187.706 175.768,187.071 180.442,182.397 U$1.LCD_D20/PD20
NetU$1_LCD_D21/PD21: U$1.LCD_D21/PD21 U$3.42 | length 85.5
  Top Layer w0.2: U$3.42 166.472,191.262 165.1,192.634 165.1,198.331 172.001,205.232 172.001,206.393 172.618,207.01 174.001,207.01 174.117,207.126 178.116,207.126 178.791,206.451 178.791,194.615 182.372,191.033 U$1.LCD_D21/PD21
NetU$1_LCD_D22/PD22: U$1.LCD_D22/PD22 U$3.44 | length 98.2
  Top Layer w0.2: U$3.44 166.333,190.258 164.694,191.898 164.694,206.121 167.977,209.404 181.774,209.404 183.439,207.74 183.439,150.774 183.134,150.47 U$1.LCD_D22/PD22
NetU$1_LCD_D23/PD23: U$1.LCD_D23/PD23 U$3.46 | length 89.3
  Top Layer w0.2: U$3.46 161.747,189.258 160.909,190.096 160.909,212.903 161.036,213.03 187.833,213.03 191.389,209.474 ; 180.873,125.171 180.873,149.555 181.28,149.962 U$1.LCD_D23/PD23
NetU$1_LCD_HSYNC/PD26: U$1.LCD_HSYNC/PD26 X1.13 | length 72.4
  Top Layer w0.2: X1.13 176.519,209.804 183.389,209.804 184.709,208.484 184.709,148.768 184.404,148.463 U$1.LCD_HSYNC/PD26
NetU$1_LCD_VSYNC/PD27: U$1.LCD_VSYNC/PD27 X1.14 | length 72.6
  Top Layer w0.2: X1.14 178.78,211.811 182.76,211.811 185.115,209.455 185.115,148.59 184.506,147.98 U$1.LCD_VSYNC/PD27
NetU$1_UDM1: U$1.UDM1 U$7.12 | length 142.7
  Top Layer w0.2: 140.779,114.465 168.566,114.465 170.726,114.465 180.975,124.714 180.975,134.747 ; 140.779,114.49 134.423,120.847 134.423,143.186 135.001,143.764 151.117,143.764 151.117,152.457 156.682,158.021 U$7.12 ; 181.153,132.08 181.381,132.309 181.661,132.309 181.81,132.458 U$1.UDM1
NetU$1_UDP0: U$1.UDP0 U$7.11 | length 146.1
  Top Layer w0.2: U$7.11 156.182,158.087 150.642,152.547 150.642,144.272 134.867,144.272 134.023,143.428 134.023,120.358 140.316,114.065 178.1,114.065 183.242,119.207 183.242,131.647 182.931,131.958 U$1.UDP0 182.058,131.958 182.008,131.908 U$1.UDP0@181.864,131.908
NetU$1_UDP1: U$1.UDP1 U$11.USBDN0 | length 109.8
  Top Layer w0.2: U$11.USBDN0 116.637,150.825 116.84,151.028 118.93,151.028 133.623,136.335 133.623,119.996 139.954,113.665 179.07,113.665 183.642,118.237 183.642,132.247 182.931,132.958
NetU$1_V33_USB: U$1.V33_USB U$11.USBDP0 | length 111.1
  Top Layer w0.2: U$11.USBDP0 117.297,149.352 117.551,149.098 120.294,149.098 133.223,136.169 133.223,119.83 139.788,113.265 179.578,113.265 184.277,117.964 184.277,132.715 183.534,133.458 U$1.V33_USB
NetU$3_27: U$3.27 X1.3 | length 12
  Top Layer w0.2: U$3.27 174.089,204.326 X1.3
NetU$3_31: U$3.31 X1.2 | length 11.9
  Top Layer w0.2: U$3.31 172.085,204.622 X1.2
NetU$3_33: U$3.33 X1.1 | length 49.3
  Top Layer w0.2: U$3.33 171.069,205.588 170.917,205.74 168.377,208.28 162.738,208.28 167.081,212.623 183.417,212.623 X1.1@187.76,208.28
NetU$4_LDO3IN: U$4.LDO3IN U$4.VIN1
NetU$11_TEST0: U$11.TEST0 U$11.TEST1 | length 0.7
  Top Layer w0.2: U$11.TEST1 U$11.TEST0
NetU$11_USBDN1: U$11.USBDN1 X2.2 | length 65.8
  Top Layer w0.2: X2.2 106.156,207.534 115.341,198.349 U$11.USBDN1
NetU$11_USBDN2: U$11.USBDN2 X3.2 | length 77.5
  Top Layer w0.2: X3.2 90.005,213.668 90.005,214.17 90.18,214.346 91.572,214.346 112.751,193.167 U$11.USBDN2
NetU$11_USBDN3: U$11.USBDN3 X7.2 | length 96.6
  Top Layer w0.2: U$11.USBDN3 103.89,147.047 96.686,147.047 93.091,143.452 93.091,90.475 93.142,90.424 96.825,90.424 97.434,91.034 97.434,97.003 98.349,97.917 112.919,97.917 113.3,97.536 X7.2
NetU$11_USBDN4: U$11.USBDN4 X6.2 | length 61.5
  Top Layer w0.2: X6.2 93.996,143.272 96.545,145.821 U$11.USBDN4
NetU$11_USBDN5: U$11.USBDN5 X5.2 | length 178.5
  Top Layer w0.2: X5.2 80.159,154.416 82.575,152 82.575,135.433 80.848,133.706 74.397,133.706 74.193,133.502 74.193,131.877 75.551,130.519 75.551,105.526 90.145,90.932 90.145,87.114 90.721,86.538 118.466,86.538 118.694,86.766 118.694,114.097 102.997,129.794 102.997,143.002 103.226,143.231 U$11.USBDN5
NetU$11_USBDN6: U$11.USBDN6 X4.3 | length 150.9
  Top Layer w0.2: X4.3 74.371,135.128 73.762,134.518 73.762,131.547 74.651,130.658 74.651,105.86 86.881,93.63 86.881,86.97 87.744,86.106 118.643,86.106 119.101,86.563 119.101,114.503 105.054,128.549 105.054,141.61 105.105,141.661 U$11.USBDN6
NetU$11_USBDP1: U$11.USBDP1 X2.3 | length 66.4
  Top Layer w0.2: X2.3 104.14,208.534 114.706,197.968 U$11.USBDP1
NetU$11_USBDP2: U$11.USBDP2 X3.3 | length 82.5
  Top Layer w0.2: X3.3 86.453,214.371 89.159,214.371 89.523,214.007 89.605,214.089 89.605,214.336 90.015,214.746 92.848,214.746 113.386,194.208 U$11.USBDP2
NetU$11_USBDP3: U$11.USBDP3 X7.3 | length 95.8
  Top Layer w0.2: U$11.USBDP3 103.927,147.744 96.817,147.744 92.659,143.586 92.659,89.357 94.463,87.554 114.275,87.554 115.316,88.595 X7.3
NetU$11_USBDP4: U$11.USBDP4 X6.3 | length 60
  Top Layer w0.2: X6.3 96.012,144.526 96.672,145.186 U$11.USBDP4
NetU$11_USBDP5: U$11.USBDP5 X5.3 | length 188.9
  Top Layer w0.2: X5.3 80.467,152.4 81.28,151.587 81.28,137.033 80.467,136.22 73.863,136.22 73.33,135.687 73.33,131.065 74.227,130.168 74.227,105.718 86.125,93.82 86.125,86.443 86.97,85.598 121.05,85.598 122.352,86.9 122.352,133.121 119.99,135.484 114.503,135.484 106.121,143.866 U$11.USBDP5
pads on no net: C?.1@68.072,106.807 C?.1@69.342,166.878 C?.1@78.486,143.764 C?.1@132.715,101.346 C?.1@136.525,153.67 C?.1@136.652,158.369 C?.1@138.176,101.092 C?.1@143.51,100.584 C?.1@148.971,100.838 C?.1@153.797,101.092 C?.1@158.623,100.965 C?.1@163.703,158.115 C?.1@163.703,162.687 C?.1@163.703,167.259 C?.1@163.703,172.212 C?.1@164.084,100.965 C?.1@169.037,100.838 C?.1@174.752,98.425 C?.1@180.467,98.679 C?.1@185.928,98.679 C?.1@188.214,176.657 C?.1@188.214,192.151 C?.1@188.341,171.958 C?.1@188.341,186.817 C?.1@188.468,181.737 C?.1@188.468,197.104 C?.1@188.722,152.908 C?.1@188.722,157.48 C?.1@188.722,167.132 C?.1@188.849,162.179 C?.1@189.738,111.506 C?.1@189.738,116.459 C?.1@189.738,121.285 C?.1@189.738,126.111 C?.1@189.738,130.937 C?.1@191.262,98.425 C?.1@196.469,98.425 C?.2@68.072,114.427 C?.2@69.342,174.498 C?.2@86.106,143.764 C?.2@132.715,108.966 C?.2@138.176,108.712 C?.2@143.51,108.204 C?.2@144.145,153.67 C?.2@144.272,158.369 C?.2@148.971,108.458 C?.2@153.797,108.712 C?.2@158.623,108.585 C?.2@164.084,108.585 C?.2@169.037,108.458 C?.2@171.323,158.115 C?.2@171.323,162.687 C?.2@171.323,167.259 C?.2@171.323,172.212 C?.2@174.752,106.045 C?.2@180.467,106.299 C?.2@185.928,106.299 C?.2@191.262,106.045 C?.2@195.834,176.657 C?.2@195.834,192.151 C?.2@195.961,171.958 C?.2@195.961,186.817 C?.2@196.088,181.737 C?.2@196.088,197.104 C?.2@196.342,152.908 C?.2@196.342,157.48 C?.2@196.342,167.132 C?.2@196.469,106.045 C?.2@196.469,162.179 C?.2@197.358,111.506 C?.2@197.358,116.459 C?.2@197.358,121.285 C?.2@197.358,126.111 C?.2@197.358,130.937 D?.A@141.732,198.374 D?.C@131.572,206.502 D?.C@141.732,205.994 IC4.3 IC4.4 IC4.7 J19.1 J19.2 J25.1 J25.2 L?.1@125.992,195.072 L?.2@126.992,195.072 MK?.2 R?.1@109.982,172.085 R?.1@110.236,174.371 R?.1@143.764,187.11 R?.1@150.876,196.254 R?.1@162.052,201.842 R?.1@162.052,216.574 R?.2@117.602,172.085 R?.2@117.856,174.371 R?.2@143.764,188.81 R?.2@150.876,197.954 R?.2@162.052,203.542 R?.2@162.052,218.274 R?.2@165.354,182.372 R?.3 S1.1 S1.1B S1.+G S1.+R S1.-G S1.-R S1.NO T?.1 T?.2 T?.3 T?.4 T?.5 T?.6 T?.7 T?.8 T?.10 T?.12 T?.13 T?.15 U$1.AGND U$1.AVCC U$1.CSI_D0/SDC_D0/PE4 U$1.CSI_D2/SDC2_D2/PE6 U$1.CSI_D3/SDC2_D3/PE7 U$1.CSI_D4/SDC2_CMD/PE8 U$1.CSI_D5/SDC2_CLK/PE9 U$1.CSI_D6/UART1_TX/PE10 U$1.CSI_D7/UART1_RX/PE11 U$1.CSI_DI/SDC2_DI/PE5 U$1.CSI_HSYNC/SP2_MOSI/P U$1.CSI_MCLK/SPI2_CLK/EI U$1.CSI_PCLK/SPI2_CS0/EI U$1.CSI_VSYNC/SPI2_MISO/ U$1.DDR3_A13 U$1.DDR3_A14 U$1.DDR3_BA1 U$1.DDR3_BA2 U$1.DDR3_CK U$1.DDR3_CK_N U$1.DDR3_CKE U$1.DDR3_D0 U$1.DDR3_D1 U$1.DDR3_D2 U$1.DDR3_D3 U$1.DDR3_D4 U$1.DDR3_D5 U$1.DDR3_D6 U$1.DDR3_D7 U$1.DDR3_D9 U$1.DDR3_D10 U$1.DDR3_D11 U$1.DDR3_D12 U$1.DDR3_D13 U$1.DDR3_D14 U$1.DDR3_D15 U$1.DDR3_DM0 U$1.DDR3_DM1 U$1.DDR3_DQS0_N U$1.DDR3_DQS1_N U$1.DDR3_ODT U$1.DDR3_R8 U$1.DDR3_RAS U$1.DDR3_RST U$1.DZQ U$1.HPBP U$1.HPCOM U$1.HPOUTL U$1.HPOUTR U$1.LCD_CLK/PD24 U$1.LCD_D3/PD3 U$1.LCD_D4/PD4 U$1.LCD_D5/PD5 U$1.LCD_D6/PD6 U$1.LCD_D11/PD11 U$1.LCD_D14/PD14 U$1.LCD_DE/PD25 U$1.LRADC U$1.NALE/SPIO_MISO/PCI U$1.NC U$1.NCE0 U$1.NCE1/SPIO0/PC3 U$1.NCLE/SPIO_CLK/PC2 U$1.NDQ0/SDC2_D0/PC8 U$1.NDQ1/SDC2_D1/PC9 U$1.NDQ2/SDC2_D2/PC10 U$1.NDQ3/SDC2_D3/PC11 U$1.NDQ4/SDC2_D4/PC12 U$1.NDQ5/SDC2_D5/PC13 U$1.NDQ6/SDC2_D6/PC14 U$1.NDQ7/SDC2_D7/PC15 U$1.NDQS/PC19 U$1.NMI_N U$1.NRB0/SDC2_CMD/PC6 U$1.NRB1/SDC2_CLK/PC7 U$1.NRE U$1.NWE/SPIO_MOSI/PC0 U$1.PB2/EINT16 U$1.PB3/EINT17 U$1.PB4_EINT18 U$1.PB10/EINT24 U$1.PB15 U$1.PB16 U$1.PB17 U$1.PB18 U$1.PG0/EINT0 U$1.PG1/EINT1 U$1.PG2/EINT2 U$1.PG3/UART1_TX/EINT3 U$1.PG4/UART1_RX/EINT14 U$1.PG9/SPI1_CS0/UART3_T U$1.PG10/SPI1_CLK/UART3_ U$1.PG11/SPI1_MOSI/EINT1 U$1.PG12/SPI1_MISO/UART3 U$1.RESET_N U$1.SDC0/PF1 U$1.SDC0_CLK/PF2 U$1.SDC0_DI/PF0 U$1.SVREF U$1.TPX1 U$1.TPX2 U$1.TPY1 U$1.TPY2 U$1.TWIO-SDA/PB1 U$1.UBOOT U$1.UDM0 U$1.V33_HP U$1.VCC1 U$1.VCC1_DRAM U$1.VCC2 U$1.VCC2_DRAM U$1.VCC3 U$1.VCC3_DRAM U$1.VCC4 U$1.VCC4_DRAM U$1.VCC5_DRAM U$1.VDD1_CPU U$1.VDD1_INT U$1.VDD2_CPU/PB10/EINT24 U$1.VDD2_INT U$1.VDD3-INT U$1.VDD3_CPU U$1.VDD4_CPU U$1.VDD4_INT U$1.VDD5_CPU U$1.VDD5_INT U$1.VDD6_CPU U$1.VDD7_CPU U$1.VDD8_CPU U$1.VMIC U$1.VRA1 U$1.VRA2 U$1.VRP U$1.X24MIN U$1.X24OUT U$3.1 U$3.2 U$3.5 U$3.9 U$3.10 U$3.11 U$3.12 U$3.13 U$3.14 U$3.15 U$3.17 U$3.18 U$3.20 U$3.21 U$3.22 U$3.23 U$3.24 U$3.25 U$3.26 U$3.28 U$3.29 U$3.30 U$3.32 U$3.34 U$3.35 U$3.36 U$3.38 U$3.39 U$3.40 U$3.43 U$3.47 U$3.48 U$3.EXP U$4.ACIN U$4.ACIN1 U$4.AGND U$4.APS U$4.BACKUP U$4.BAT U$4.BAT1 U$4.BATSENSE U$4.BIAS U$4.CHGLED U$4.CHSENSE U$4.DC3SET U$4.DCDC2 U$4.DCDC3 U$4.EXP U$4.EXTEN U$4.GPIO0 U$4.GPIO1 U$4.GPIO2 U$4.GPIO3 U$4.IPSOUT U$4.IPSOUT1 U$4.IRQ U$4.LDO2 U$4.LDO3 U$4.LDO4 U$4.LDO24IN U$4.N_OE U$4.N_VBUSEN U$4.PGND1 U$4.PGND2 U$4.PGND3 U$4.PWREN U$4.SCK U$4.SDA U$4.VBUS U$4.VIN2 U$4.VIN3 U$4.VREF U$6.GND U$6.GND1 U$7.1 U$7.4 U$7.7 U$7.8 U$7.10 U$7.13 U$7.14 U$7.15 U$7.16 U$7.17 U$7.18 U$7.19 U$7.20 U$7.21 U$7.22 U$7.23 U$7.24 U$7.25 U$7.26 U$7.27 U$7.28 U$7.29 U$7.30 U$7.31 U$7.32 U$7.33 U$7.34 U$7.35 U$7.36 U$7.37 U$7.38 U$7.39 U$7.40 U$7.41 U$7.42 U$7.43 U$7.44 U$7.45 U$7.46 U$7.47 U$7.49 U$7.50 U$7.51 U$7.53 U$7.54 U$7.55 U$7.56 U$7.EPAD U$10.GND U$10.LEFT1 U$10.LEFT2 U$10.RIGHT1 U$10.RIGHT2 U$11.AM1/GANG_EN U$11.AM2/MTT_EN U$11.AM3 U$11.AM4/LED_EN U$11.AM5 U$11.AM6 U$11.AM7 U$11.ATEST/REG_EN U$11.CFG_SEL1 U$11.CLKIN_EN U$11.GR1/NON_REM0 U$11.GR2_NON_REM1 U$11.GR3/PRT_DIS0 U$11.GR4/PRT_DIS1 U$11.GR5 U$11.GR6 U$11.GR7 U$11.OCS1_N U$11.OCS4_N U$11.OCS5_N U$11.OCS6_N U$11.OCS7_N U$11.PRTPWR1 U$11.PRTPWR2 U$11.PRTPWR6 U$11.PRTPWR_POL U$11.RBIAS U$11.RESET_N U$11.SCL/SMBCLK/CFG_SEL0 U$11.SDA/SMBDATA U$11.USBDN7 U$11.USBDP6 U$11.USBDP7 U$11.VBUS_DET U$11.VDD18 U$11.VDD18.2 U$11.VDD18.3 U$11.VDD33 U$11.VDD33.3 U$11.VDD33CR U$11.VDDA3.1 U$11.VDDA18/PLL U$11.VDDA33 U$11.VDDA33.2 U$11.VDDA33.4 U$11.VDDA33/PLL U$11.VSS U$11.VSS0 U$11.VSS1 U$11.VSS3 U$11.VSS4 U$11.VSS6 U$11.VSS7 U$11.VSS8 U$11.VSS9 U$11.XTAL1/CLKIN U$11.XTAL2 U?.1@137.606,141.464 U?.2@61.214,199.39 U?.3@61.214,200.66 U?.4 U?.6 U?.7 U?.8 U?.9 U?.10 U?.11 U?.12 U?.13 U?.14 U?.15 U?.18 U?.19 U?.20 U?.21 U?.27 U?.28 U?.37 U?.38 U?.39 U?.40 U?.41 U?.42 U?.43 U?.44 U?.45 U?.46 U?.47 U?.48 U?.49 U?.50 U?.51 U?.52 U?.53 U?.54 X1.4 X1.5 X1.6 X1.7 X1.8 X1.9 X1.10 X1.11 X1.12 X1.15 X2.4 X3.4 X4.2 X4.4 X5.4 X6.1 X6.4 X7.1 X7.4
copper on no net: | length 275.8
  Top Layer w0.2: 62.103,211.582 57.658,207.137 57.658,195.453 69.342,183.769 69.342,174.498 ; 84.626,171.983 84.626,171.985 ; 85.126,171.983 85.126,171.985 ; 126.992,195.072 126.992,209.02 125.489,210.523 125.489,214.294 129.185,214.294 131.572,211.907 131.572,206.502 ; 158.232,182.146 158.232,182.646 ; 169.037,192.278 169.037,192.761 ; 169.57,187.683 169.799,187.683 169.824,187.708 170.078,187.708 ; 173.089,194.31 172.589,194.31 172.589,203.704 174.346,205.461 174.569,206.726 175.971,206.726 176.505,206.192 ; 174.589,194.132 174.589,194.31 ; 175.639,189.258 175.639,188.758 175.639,188.518 175.664,188.493 175.664,188.258 ; 152.832,193.358 152.832,219.38 152.832,193.358
  Top Layer w0.254: 143.256,116.332 164.973,116.332 ; 53.095,219.202 ccw(c56.515,219.202) 59.935,219.202 ; 53.095,219.202 cw(c56.515,219.202) 59.935,219.202 ; 53.095,219.202 ccw(c56.515,219.202) 59.935,219.202 ; 53.095,219.202 cw(c56.515,219.202) 59.935,219.202 ; 55,82.931 ccw(c58.42,82.931) 61.84,82.931 ccw(c58.42,82.931) 55,82.931 ; 190.509,82.804 ccw(c193.929,82.804) 197.349,82.804 ccw(c193.929,82.804) 190.509,82.804 ; 192.033,219.964 ccw(c195.453,219.964) 198.873,219.964 ccw(c195.453,219.964) 192.033,219.964

## Keep-outs
Keep-Out Layer:
  lines w0.254: 50.8,76.2 50.8,226.2 ; 50.8,76.2 200.8,76.2 ; 50.8,76.2 50.8,226.2 ; 50.8,76.2 200.8,76.2 ; 50.8,76.2 200.8,76.2 ; 50.8,76.2 50.8,226.2 ; 50.8,226.2 200.8,226.2 ; 50.8,226.2 200.8,226.2 ; 50.8,226.2 200.8,226.2 ; 200.8,76.2 200.8,226.2 ; 200.8,76.2 200.8,226.2 ; 200.8,76.2 200.8,226.2
  lines w0.3: 38.705,44.891 38.705,42.291 41.305,42.291 ; 38.705,56.338 41.305,56.338 ; 51.557,42.291 51.557,44.891 ; 51.557,203.738 51.557,56.338 198.956,56.338 ; 51.557,224.9 198.956,224.9 ; 192.924,56.338 192.924,203.738

## Other copper
Top Layer:
  text "Wakame ARM Computer Board" at 127.254,95.377 h1.52
  text "Copyright 2016 Wakame Project" at 127.381,92.075 h1.52
  text "You can study, modify, manufacture this board" at 127.381,88.773 h1.52
  text "under the GNU LGPL licence terms for" at 127.254,85.598 h1.52
  text "what concerns to open hardware." at 127.254,82.55 h1.52

## Silkscreen, mask and mechanical layers (free items; w line width, h text height)
Drill Drawing:
  text ".LEGEND" at 205.88,84.535 h1.52
  text "Drill Drawing." at 205.88,70.996 h1.52

## Dimensions
33.006,30.047 to 51.557,56.338 on Mechanical 1
30.834,35.397 to 51.557,56.338 on Mechanical 1

## Text inside footprints (layer, text, board x,y; h text height)
J19: Top Overlay "0Û" at 140.589,163.195 h1.97 r180
U$1: Mechanical 2 "ALLWINNER  A13" at 161.752,139.873 h1.97
U$4: Mechanical 2 ">AXP202" at 84.376,179.273 h1.97
U$6: Mechanical 2 "PWR_IN" at 70.612,226.06 h2.76 r270
U$10: Top Overlay "3,5mm" at 148.59,222.123 h1.97 r270; Mechanical 16 "5" at 140.081,215.519 h1.97 r270; Mechanical 16 "4" at 141.986,209.931 h1.97 r270; Mechanical 16 "3" at 146.05,212.598 h1.97 r270; Mechanical 16 "2" at 148.59,211.201 h1.97 r270; Mechanical 16 "1" at 143.51,221.742 h1.97 r270
U?: Top Overlay "3" at 63.635,199.857 h1.5; Top Overlay "1" at 63.635,197.411 h1.5
X1: Top Overlay "1" at 169.774,206.172 h1.97 r180; Top Overlay "5" at 182.175,206.273 h1.97 r180; Top Overlay "6" at 168.656,208.845 h1.97 r180; Top Overlay "10" at 182.375,208.945 h1.97 r180; Top Overlay "15" at 183.08,211.845 h1.97 r180; Top Overlay "11" at 169.266,211.545 h1.97 r180; Top Overlay "Female" at 172.847,217.932 h1.97 r180; Mechanical 16 "HDF15 CONEC" at 181.324,222.997 h1.97 r180
X2: Top Overlay "USB" at 106.156,224.307 h1.57 r180
X3: Top Overlay "USB" at 88.376,224.307 h1.57 r180
X4: Top Overlay "USB" at 64.237,137.144 h1.57 r270
X5: Top Overlay "USB" at 64.237,154.416 h1.57 r270
X6: Top Overlay "USB" at 93.996,80.493 h1.57
X7: Top Overlay "USB" at 113.3,81.001 h1.57